# Altium PCB thucthi.PcbDoc
Units mil, origin at the board's own origin, x right, y up, seen from the top; angles counter-clockwise.
Board outline 2470.03 x 4445.03 mil, 2 copper layers (Top Layer, Bottom Layer); 34 components, 19 nets, 83 pads, 6 vias.
Unrouted connection lines stored in the file: 5.
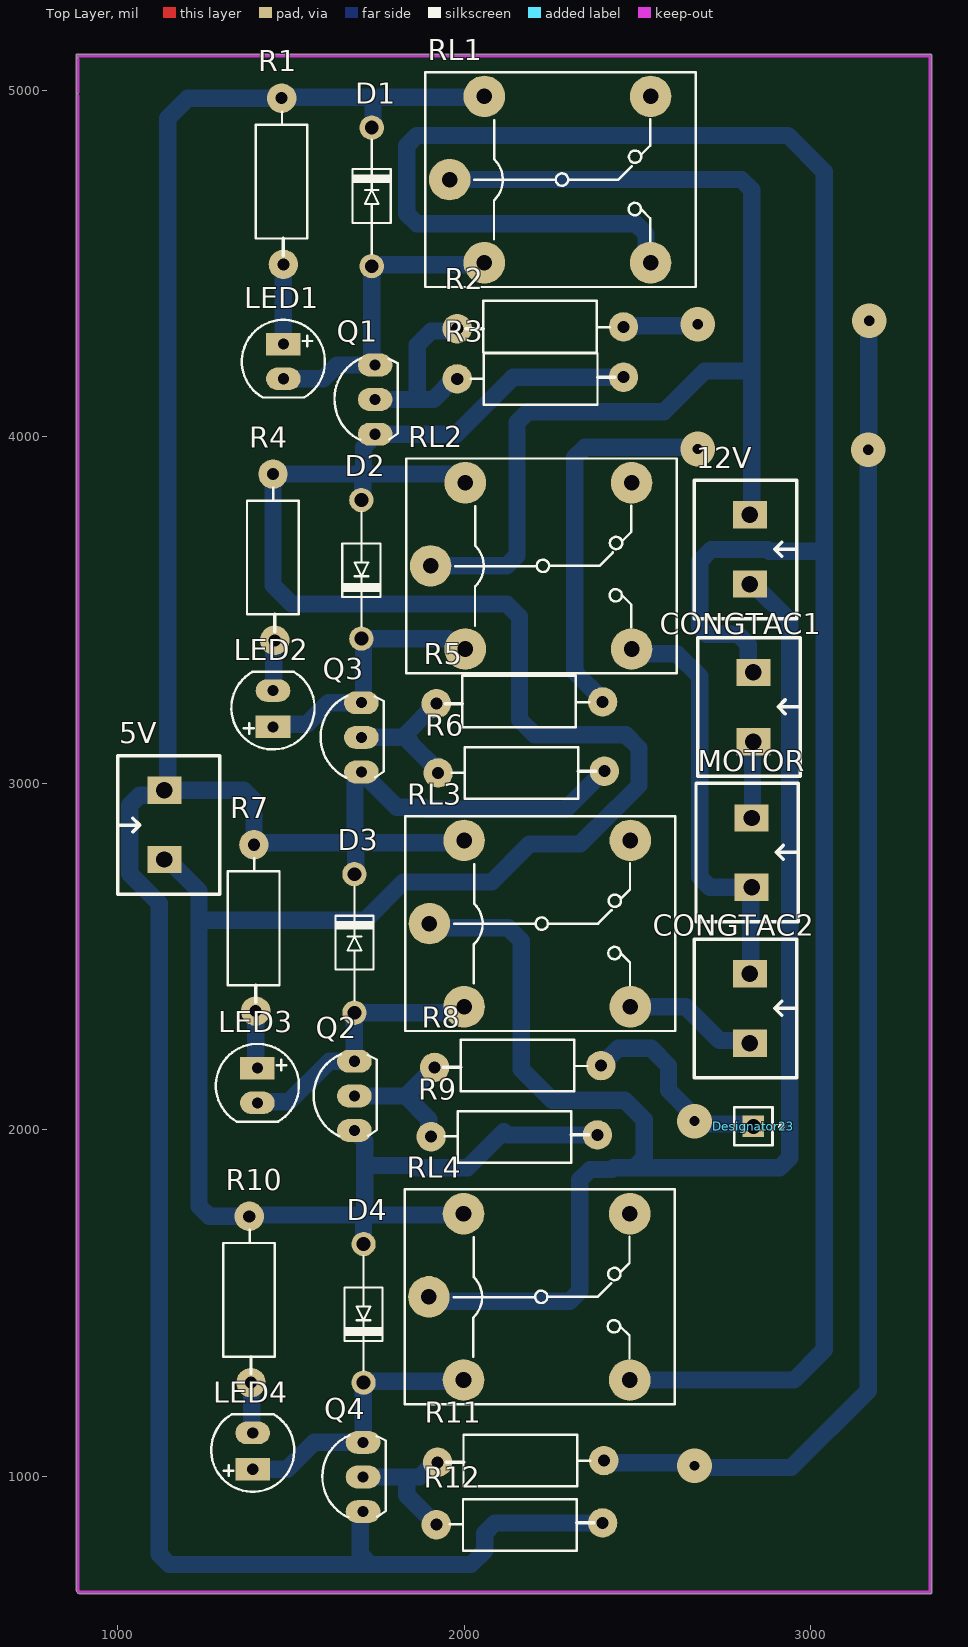
[diagram p0: Top Layer view]
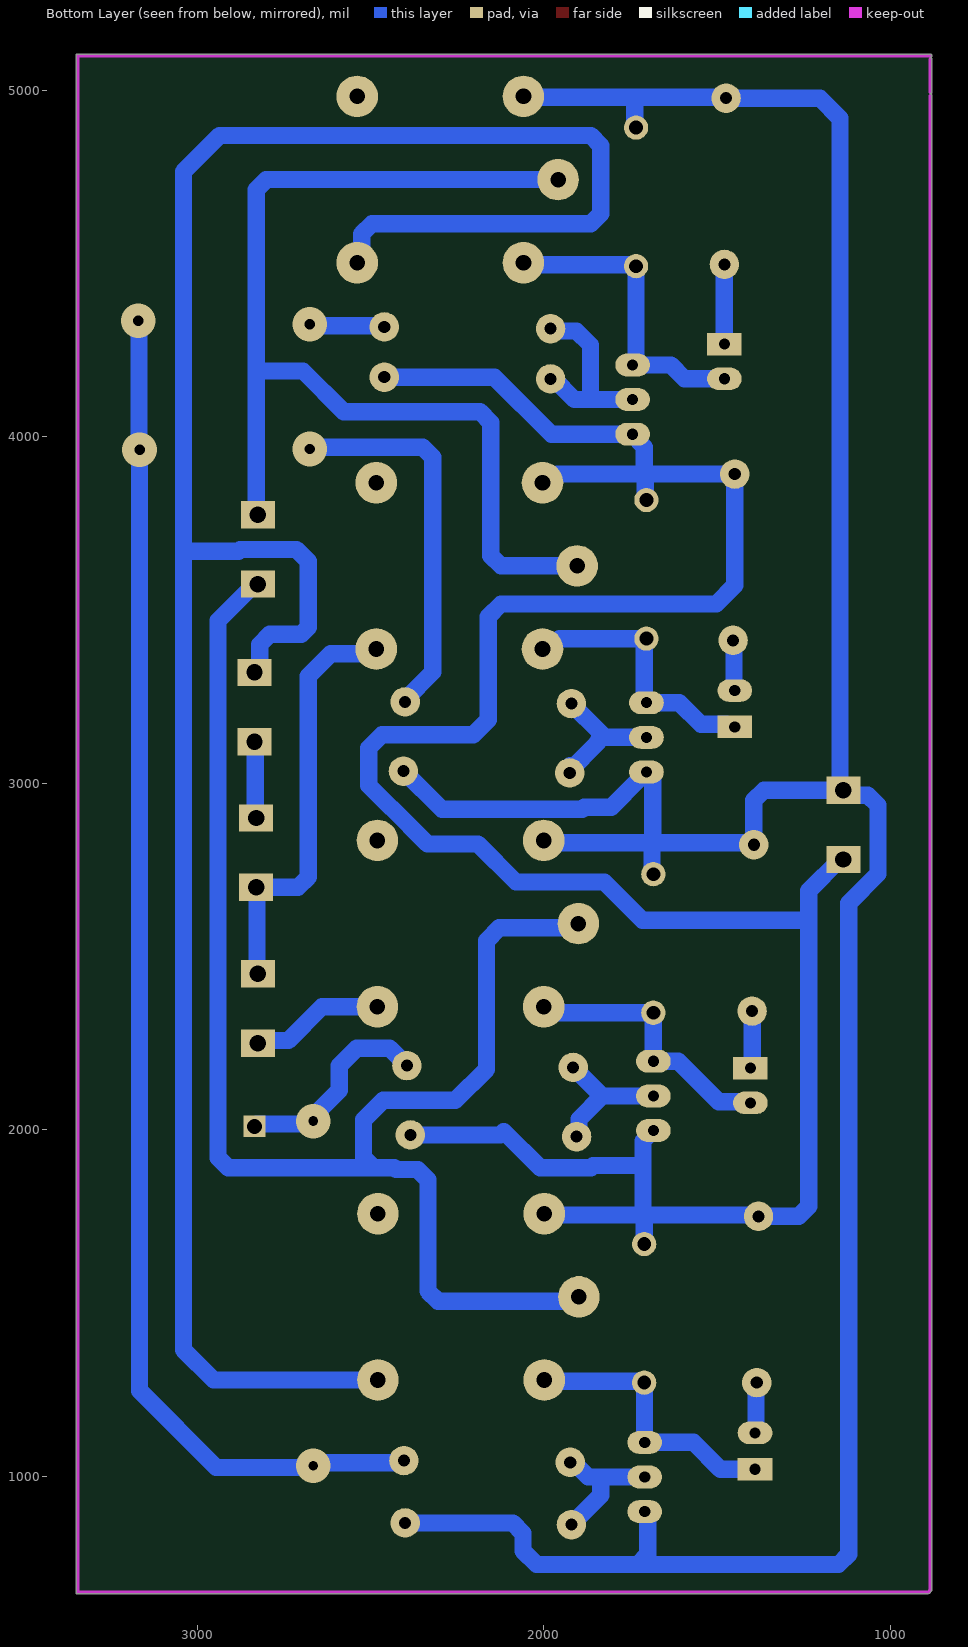
[diagram p1: Bottom Layer view, seen from below]
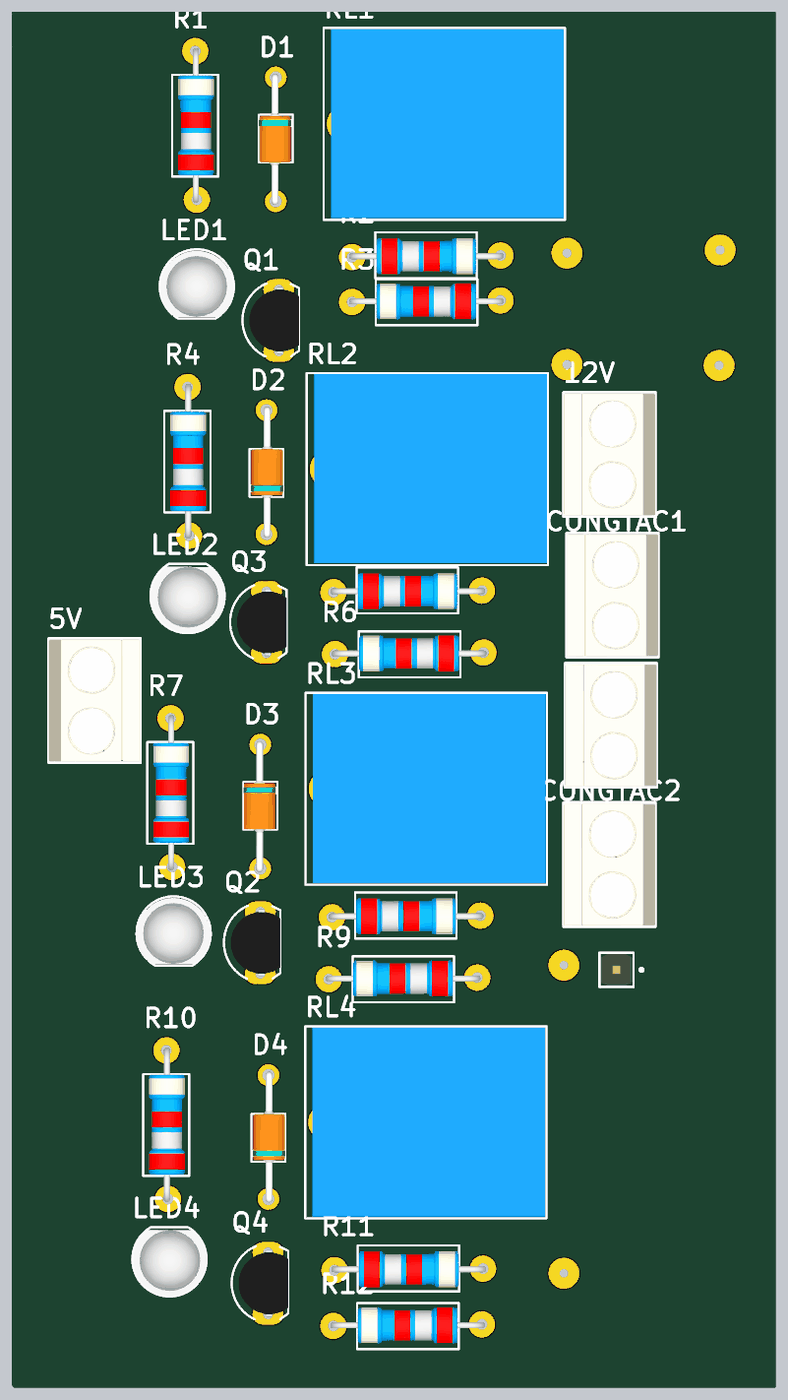
[diagram p2: 3D render of the assembled board from above, using the file's embedded part models]

## Layer stack, top to bottom
Top Solder: solder mask 0.4, Solder Resist, Dk 3.5
Top Layer: signal copper 1.4
Dielectric 1: dielectric 12.6, FR-4, Dk 4.8
Bottom Layer: signal copper 1.4
Bottom Solder: solder mask 0.4, Solder Resist, Dk 3.5

## Board outline
879.99,670 879.99,4985 cw(c885,4985) 884.61,4990 cw(c885,4995) 879.99,4995 879.99,5090 cw(c885,5090) 884.61,5095 cw(c885,5100) 885,5105.01 3345,5105.02 cw(c3345,5100) 3350.01,5100 3350.01,665 cw(c3345,665) 3345,659.99 890,659.99 886.45,661.45

## Design rules (kind name [scope] priority, off if disabled: settings)
Clearance [All] p1: gap=10 ignorepadtopadclearanceinfootprint=FALSE except(50: Arc-Arc Arc-Track Arc-Via Track-Track Track-Via)
PolygonConnect [All] p1: connectstyle=Relief reliefconductorwidth=10 reliefentries=4 polygonreliefangle="90 Angle" airgapwidth=10
RoutingVias [All] p1: holewidth=28 width=50 viastyle="Through Hole" minholewidth=28 minwidth=50 maxholewidth=28 maxwidth=50
SolderMaskExpansion [All] p1: expansion=4 istentingtop=FALSE
SupplyNets "Schematic Supply Nets_1" [InNet('VCC')] p1: voltage=0.000
SupplyNets "Schematic Supply Nets" [InNet('GND')] p2: voltage=0.000
Width [All] p1: maxlimit=50 minlimit=15 preferedwidth=40
30 further rules are at their usual default settings.

## Classes and differential pairs
component class thucthi: 5V 12V D1 D2 D3 D4 LED1 LED2 LED3 LED4 MOTOR Q1 Q2 Q3 Q4 R1 R2 R3 R4 R5 R6 R7 R8 R9 R10 R11 R12 RL1 RL2 RL3 RL4

## Components (designator, comment, footprint, x,y, rotation, side; value= is the part's Value field where it differs from the comment)
5V "Header 2 - M" "Medium - Header 2" 1135,2880 r90 top
12V "Header 2 - M" "Medium - Header 2" 2825,3675 r270 top
CONGTAC1 "Header 2 - M" "Medium - Header 2" 2835,3220 r270 top (schematic designator MOTOR)
CONGTAC2 "Header 2 - M" "Medium - Header 2" 2825,2350 r270 top (schematic designator MOTOR)
D1 "Diode" DIO-1A 1733.52,4492.61 r90 top value=1N5007
D2 "Diode" DIO-1A 1703.52,3817.61 r270 top value=1N5007
D3 "Diode" DIO-1A 1683.52,2337.61 r90 top value=1N5007
D4 "Diode" DIO-1A 1710,1670 r270 top value=1N5007
Designator23 "Comment" JP1-D1T 2835,2010 r270 top
LED1 "LED" LED-5-RED 1478.52,4267.61 r270 top value="LED 3 ly Single Colour"
LED2 "LED" LED-5-Green 1448.52,3167.61 r90 top value="LED 3 ly Single Colour"
LED3 "LED" LED-5-RED 1403.52,2177.61 r270 top value="LED 3 ly Single Colour"
LED4 "LED" LED-5-Green 1390,1025 r90 top value="LED 3 ly Single Colour"
MOTOR "Header 2 - M" "Medium - Header 2" 2830,2800 r270 top
Q1 "2N2222" TO92-123 1743.52,4107.61 r90 top value=C1815
Q2 "2N2222" TO92-123 1683.52,2097.61 r90 top value=C1815
Q3 "2N3906" TO92-123 1703.52,3132.61 r90 top value=A1015
Q4 "2N3906" TO92-123 1708.52,997.62 r90 top value=A1015
R1 "1K" RES-1/2W 1473.52,4717.61 r90 top
R2 "4,7K" RES-1/2W 2200.29,4317.3 r0 top
R3 "47K" RES-1/2W 2240.29,4167.3 r180 top
R4 "1K" RES-1/2W 1448.52,3632.61 r90 top
R5 "4,7K" RES-1/2W 2140,3235 r0 top
R6 "47K" RES-1/2W 2185,3030 r180 top
R7 "1K" RES-1/2W 1393.52,2562.61 r90 top
R8 "4,7K" RES-1/2W 2135,2185 r0 top
R9 "47K" RES-1/2W 2165,1980 r180 top
R10 "1K" RES-1/2W 1380,1490 r90 top
R11 "4,7K" RES-1/2W 2143.52,1045 r0 top
R12 "47K" RES-1/2W 2180,860 r180 top
RL1 "Relay 10A/5V" "RELAY 5" 2283.52,4742.61 r0 top value="Relay SPDT, 10A, 12V"
RL2 "Relay 10A/5V" "RELAY 5" 2228.52,3627.61 r0 top value="Relay SPDT, 10A, 12V"
RL3 "Relay 10A/5V" "RELAY 5" 2225,2595 r0 top value="Relay SPDT, 10A, 12V"
RL4 "Relay 10A/5V" "RELAY 5" 2223.52,1517.62 r0 top value="Relay SPDT, 10A, 12V"

## Footprints (in the part's own frame and the unit in brackets; to place one, negate y for a bottom-side part, rotate by r counter-clockwise, add the part's x,y. Pads: shape width x height; smd on the part's side, far side on the other; paste and mask are expansions set on the pad)
DIO-1A [mil]
  round 70 hole 40: 1(0,0) 2(400,0)
  silkscreen extent 35,-55 365,55, body extent -11,-50 411,54, height 102
JP1-D1T [mm] "1pins, 1 row, straight, gold plating"
  rect 1.6x1.6 hole 1.1: 1(0,0)
  silkscreen extent -1.4,-1.4 1.4,2.18, body extent -1.27,-1.27 1.27,1.27, height 8.54
LED-5-Green [mil] "LED 2 PIN, 5 ly , Only colour,pin to pin 100mil"
  rect 65x100 hole 32: 1(-5,0)
  oval 65x100 hole 32: 2(100,0)
  silkscreen extent -70,-120 154,120, body extent -69,-120 145,117, height 339
LED-5-RED [mil] "LED 2 PIN, 5 ly , Only colour,pin to pin 100mil"
  rect 65x100 hole 32: 1(0,0)
  oval 65x100 hole 32: 2(100,0)
  silkscreen extent -70,-120 154,120, body extent -65,-119 149,118, height 339
"Medium - Header 2" [mm]
  rect 2x2.5 hole 1.2: 1(-2.54,0) 2(2.54,0)
  silkscreen extent -5.08,-4.08 5.08,3.43, body extent -5,-4.07 5,3.43, height 10
"RELAY 5" [mil] "Reley DPDT, 8 pin, 1A, W400mil, L800mil,H 300mil"
  round 120 hole 45: 1(-325,0) 2(255,240) 3(255,-240) 4(-225,-240) 5(-225,240)
  silkscreen extent -395,-310 385,310, body extent -371,-304 381,306, height 602
RES-1/2W [mil]
  round 85 hole 35: 1(-220,-5) 2(260,0)
  silkscreen extent -195,-74 221,75, body extent -230,-60 270,56, height 121
TO92-123 [mil] "TO-92"
  oval 66x100 hole 32: 1(-100,0) 2(0,0) 3(100,0)
  silkscreen extent -117,-65 120,118, body extent -109,-66 109,95, height 245

## Part data
5V 12V CONGTAC1 CONGTAC2 MOTOR: "Header, 2-Pin, Medium", LatestRevisionDate=17-Jul-2002, LatestRevisionNote="Re-released for DXP Platform.", Publisher="Altium Limited"
D1 D2 D3 D4: "Default Diode", Code - JEDEC=DO-214-AB, Published=8-Jun-2000, Publisher="Altium Limited", Revision="July-2002: Re-released for DXP Platform."
LED1 LED2 LED3 LED4: "LED Single colour Green and Red"
Q1 Q2: library part 2N222, "NPN 600mW, ECB"
Q3 Q4: "PNP 600mW, ECB"
R1 R2 R3 R4 R5 R6 R7 R8 R9 R10 R11 R12: library part Res, "Res", Manufacturer="Generic Components", Class=Passive, Published=08/06/2000, Publisher="Altium Hobart Technology Centre", SubClass=R
RL1 RL2 RL3 RL4: library part "Relay 5", "Relay SPDT,10A - 12VDC 5 Pin"

## Via types
v1: diameter 100, hole 30, Top Layer to Bottom Layer, 4 vias
v2: diameter 100, hole 28, Top Layer to Bottom Layer, 2 vias

## Nets (pads, with @x,y where several pads share a name; then routed paths per layer and width w, separated by ;. In a path a pad name is that pad's centre, name@x,y a point inside that pad or via, vN(x,y) a via of type N, cw(c..) or ccw(c..) an arc to the next point about the centre after c; other vN are vias at no path point)
C1: 12V.1 RL1.1 RL2.1 | length 3208.5
  Bottom Layer w50: RL2.1 2123.33,3627.61 2152.61,3656.9 2152.61,4041.19 2183.73,4072.3 2577.3,4072.3 2695,4190 2830,4190 ; RL1.1 2800.71,4742.61 2830,4713.33 2830,4190 ; 12V.1 2830,3780 2830,4190
C2: 12V.2 RL3.1 RL4.1 | length 4334.5
  Bottom Layer w50: RL4.1 1911.13,1505 2305,1505 2334.29,1534.29 2334.29,1855.71 2363.58,1885 2426.42,1885 2431.42,1890 2490.71,1890 ; RL3.1@1898.52,2582.61 2128.1,2582.61 2165,2545.71 2165,2175 2255,2085 2463.58,2085 2520,2028.58 2520,1919.29 2490.71,1890 ; 12V.2 2834.84,3575 2940,3469.84 2940,1919.29 2910.71,1890 2490.71,1890
GND: 5V.1 D2.1 D4.1 Q1.1 Q2.1 R3.1 R4.2 R9.1 R10.2 RL2.5 RL4.5 | length 7749.7
  Bottom Layer w50: 5V.1 1144.84,2780 1235,2689.84 1235,2605 ; Q2.1 1696.19,1997.62 1703.58,1990.22 1703.58,1977.55 1713.52,1967.62 1713.52,1896.9 ; D2.1 1707.35,3821.44 1707.35,3886.44 1713.52,3892.61 ; D4.1 1710,1753.81 ; 1710,3888.33 1710,3970.33 1723.46,3983.78 1723.46,4000.22 1730.85,4007.61 1977.62,4007.61 2142.3,4172.3 R3.1 ; 1713.52,1753.81 1994.71,1753.81 RL4.5 ; RL2.5 1984.58,3867.61 1959.58,3892.61 1773.52,3892.61 1713.52,3892.61 ; R9.1 2125,1985 2115,1995 2010,1890 1863.58,1890 1856.67,1896.9 1713.52,1896.9 ; 1235,2605 1715,2605 1825,2715 2080,2715 2190,2825 2335.65,2825 2440.65,2930 2441.42,2930 2505,2993.58 2505,3101.92 2466.92,3140 2203.58,3140 2160,3183.58 2160,3480.83 2123.21,3517.61 1502.38,3517.61 1448.52,3571.48 R4.2 1713.52,3892.61 ; 1235,2605 1235,1779.29 1264.29,1750 R10.2 1383.81,1753.81 1710,1753.81 ; 1710,1753.81 1713.52,1757.33 1713.52,1896.9
IN: Designator23.1 R2.2 R5.2 R8.2 R11.2 | length 5872.6
  Bottom Layer w50: 2320,3360 2320,3321.17 2400,3241.17 R5.2@2400,3240 ; 2320,3365 2320,3940.71 2349.29,3970 2670,3970 v1(2675,3965) ; R8.2 2445,2235 2540,2235 2590,2185 2590,2113.53 2665,2038.53 v2(2665,2025) 2673.5,2016.5 2828.5,2016.5 Designator23.1 ; R11.2 2410.22,1038.3 2656.7,1038.3 2670,1025 2945,1025 3166.62,1246.62 v1(3166.62,3962.34) 3168.31,3964.03 3168.31,4333.31 v1(3170,4335) ; R2.2 2464.14,4321.15 2671.15,4321.15 v1(2675,4325)
  other v2: 2665,1030
N1: CONGTAC1.1 CONGTAC1.2 MOTOR.1 RL1.3 RL4.3 | length 7321.6
  Bottom Layer w50: RL4.3 2952.61,1277.62 3040,1365 3040,3690 ; RL1.3 2525.13,4516.01 2525.13,4585.71 2495.84,4615 1864.29,4615 1835,4644.29 1835,4840.71 1864.29,4870 2935,4870 3040,4765 3040,3670 2881.26,3670 2876.26,3675 2714.29,3675 2680,3640.71 2680,3450 2700,3430 2790.71,3430 2820,3400.71 2820,3334.37 2834.37,3320 CONGTAC1.1 ; MOTOR.1@2825,2905 MOTOR.1 2832.5,2902.5 2832.5,3117.5 CONGTAC1.2
N2: CONGTAC2.1 CONGTAC2.2 MOTOR.2 RL2.3 RL3.3 | length 1611.2
  Bottom Layer w50: RL3.3 2640,2355 2737.68,2257.32 2817.68,2257.32 CONGTAC2.2 ; RL2.3 2496.91,3374.22 2614.36,3374.22 2680,3308.58 2680,2729.29 2709.29,2700 MOTOR.2 2827.5,2697.5 2827.5,2452.5 CONGTAC2.1
NetD1_1: D1.1 LED1.2 Q1.3 RL1.4 | length 898.8
  Bottom Layer w50: LED1.2 1593.52,4167.61 1633.52,4207.61 Q1.3@1740.91,4207.61 ; Q1.3 Q1.3@1740.91,4207.61 ; RL1.4 2052.35,4496.44 1737.35,4496.44 D1.1 1733.52,4215.01 Q1.3@1740.91,4207.61
NetD2_2: D2.2 LED2.1 Q3.3 RL2.4 | length 786.8
  Bottom Layer w50: LED2.1 1466.02,3162.61 1473.52,3170.11 1546.02,3170.11 1608.52,3232.61 Q3.3 1710,3239.1 1710,3405.72 1703.52,3412.2 D2.2 1954.58,3417.61 1984.58,3387.61 RL2.4
NetD3_1: D3.1 LED3.2 Q2.3 RL3.4 | length 793.4
  Bottom Layer w50: LED3.2 1425.08,2077.61 1427.95,2080.49 1494.45,2080.49 1611.58,2197.61 Q2.3 D3.1 1963.67,2337.61 1981.06,2355 RL3.4
NetD4_2: D4.2 LED4.1 Q4.3 RL4.4 | length 826.1
  Top Layer w50: D4.2 D4.2@1713.81,1273.81 ; RL4.4@1994.71,1273.81 RL4.4
  Bottom Layer w50: LED4.1 1490,1020 1567.62,1097.62 Q4.3 1709.26,1098.36 1709.26,1269.26 D4.2 1713.81,1273.81 1994.71,1273.81 RL4.4
NetLED1_1: LED1.1 R1.1 | length 230
  Bottom Layer w50: LED1.1 R1.1
NetLED2_2: LED2.2 R4.1 | length 147.1
  Bottom Layer w50: LED2.2 1451.02,3270.11 1451.02,3410.11 R4.1
NetLED3_1: LED3.1 R7.1 | length 167.1
  Bottom Layer w50: R7.1 1398.52,2182.61 LED3.1
NetLED4_2: LED4.2 R10.1 | length 147.1
  Bottom Layer w50: R10.1 1387.5,1267.5 1387.5,1127.5 LED4.2
NetQ1_2: Q1.2 R2.1 R3.2 | length 553.8
  Bottom Layer w50: Q1.2 1865,4107.61 ; R3.2 1970.82,4167.3 1911.13,4107.61 1865,4107.61 ; R2.1 1973.59,4305.61 1905.61,4305.61 1865,4265 1865,4107.61
NetQ2_2: Q2.2 R8.1 R9.2 | length 403.2
  Bottom Layer w50: Q2.2 1832.62,2097.61 ; R9.2@1905,1990 1898.3,1996.7 1898.3,2030.54 1832.62,2096.23 1832.62,2097.61 ; R8.1 1832.62,2097.61
NetQ3_2: Q3.2 R5.1 R6.2 | length 418.6
  Bottom Layer w50: Q3.2 1832.38,3132.61 ; 1845,3116.17 1925,3036.17 R6.2 ; 1845,3120 1832.38,3132.61 ; R5.1@1910.53,3230 R5.1 1832.38,3142.39 1832.38,3132.61 ; R6.2@1923.52,3041.97 R6.2@1923.52,3051.45
NetQ4_2: Q4.2 R11.1 R12.2 | length 405.4
  Bottom Layer w50: Q4.2 1835,997.62 ; R12.2 1835,945 1835,997.62 ; R11.1 1914.05,1040 1871.66,997.62 1835,997.62
VCC: 5V.2 D1.2 D3.2 Q3.1 Q4.1 R1.2 R6.1 R7.2 R12.1 RL1.5 RL3.5 | length 8953.1
  Bottom Layer w50: D3.2 1687.35,2741.44 1687.35,2819.39 1696.76,2828.81 ; 1685,2828.81 1685,3025.22 1692.39,3032.61 1716.19,3032.61 1723.58,3025.22 1723.58,3012.55 1805.39,2930.75 1882.83,2930.75 1888.58,2925 2293.58,2925 2403.58,3035 R6.1 ; Q4.1 1707.39,897.62 1700,890.22 1700,774.29 1729.29,745 ; D1.2 1737.35,4896.44 1737.35,4978.94 1738.52,4980.11 ; RL3.5 1993.81,2828.81 1696.76,2828.81 ; RL1.5 2056.02,4980.11 1738.52,4980.11 ; R12.1 2089.29,865 2060,835.71 2060,785 2020,745 1729.29,745 ; 5V.2 1120.63,2965.63 1064.29,2965.63 1035,2936.34 1035,2738.58 1120,2653.58 1120,774.29 1149.29,745 1729.29,745 ; 5V.2 1364.23,2980 1393.52,2950.71 R7.2 1399.71,2828.81 1696.76,2828.81 ; 5V.2 1145,2990 1145,4920 1202.62,4977.61 R1.2 1476.02,4980.11 1738.52,4980.11
pads on no net: RL1.2 RL2.2 RL3.2 RL4.2

## Keep-outs
Keep-Out Layer:
  lines w10: 885,4985 885,670 890,665 3345,665 3345,5100 885,5100 ; 885,4995 885,5090